# Altium PCB L298N_One_Layer.PcbDoc
Units mm, origin at the board's own origin, x right, y up, seen from the top; angles counter-clockwise.
Board outline 70.5 x 69 mm, 2 copper layers (Top Layer, Bottom Layer); 21 components, 14 nets, 58 pads, 1 vias.
Unrouted connection lines stored in the file: 1.
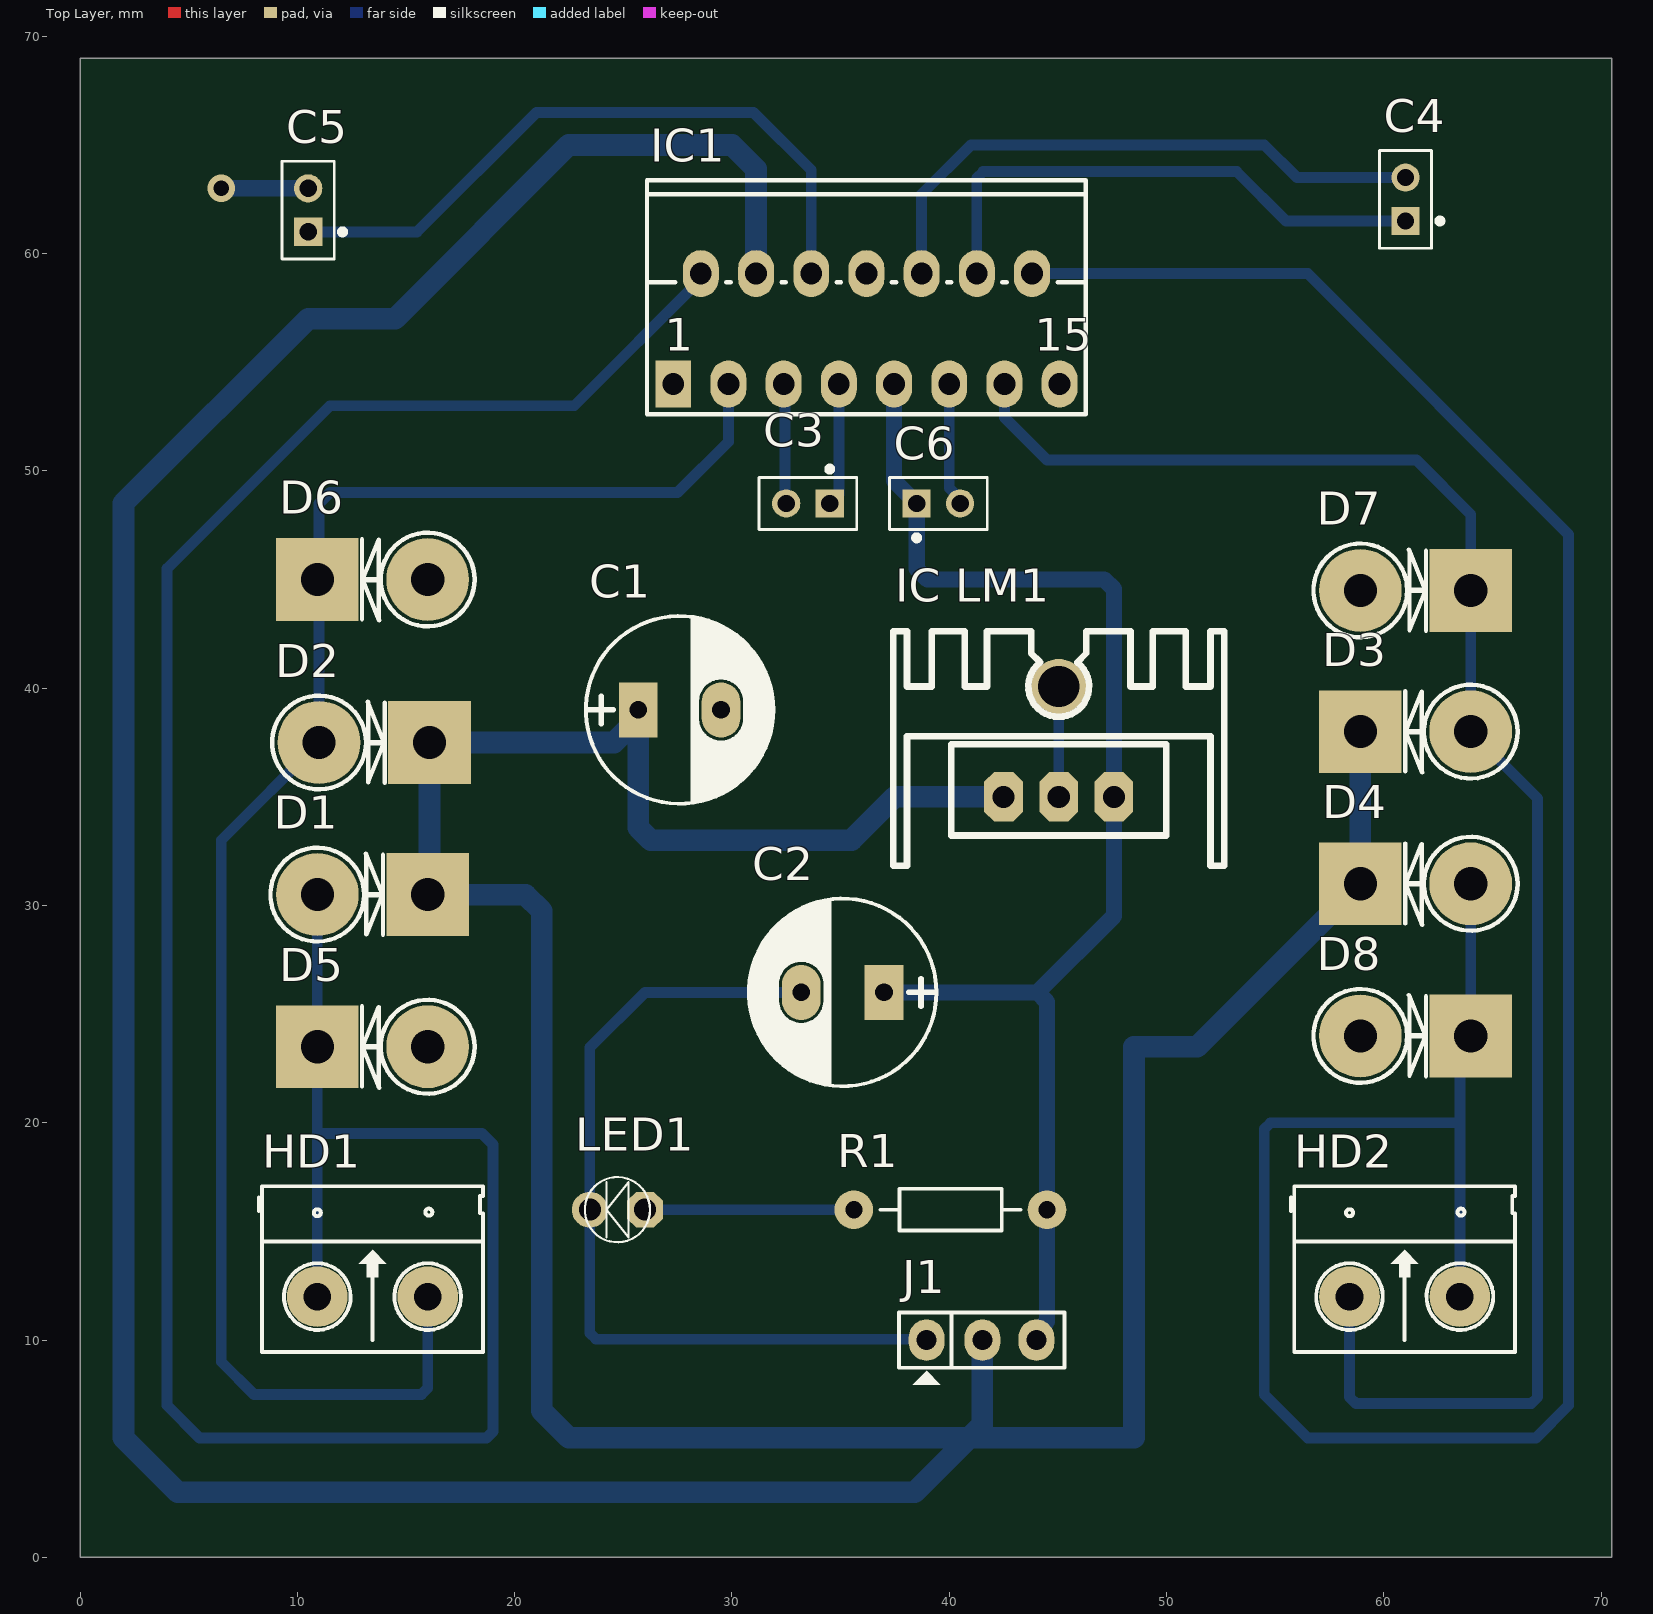
[diagram p0: Top Layer view]
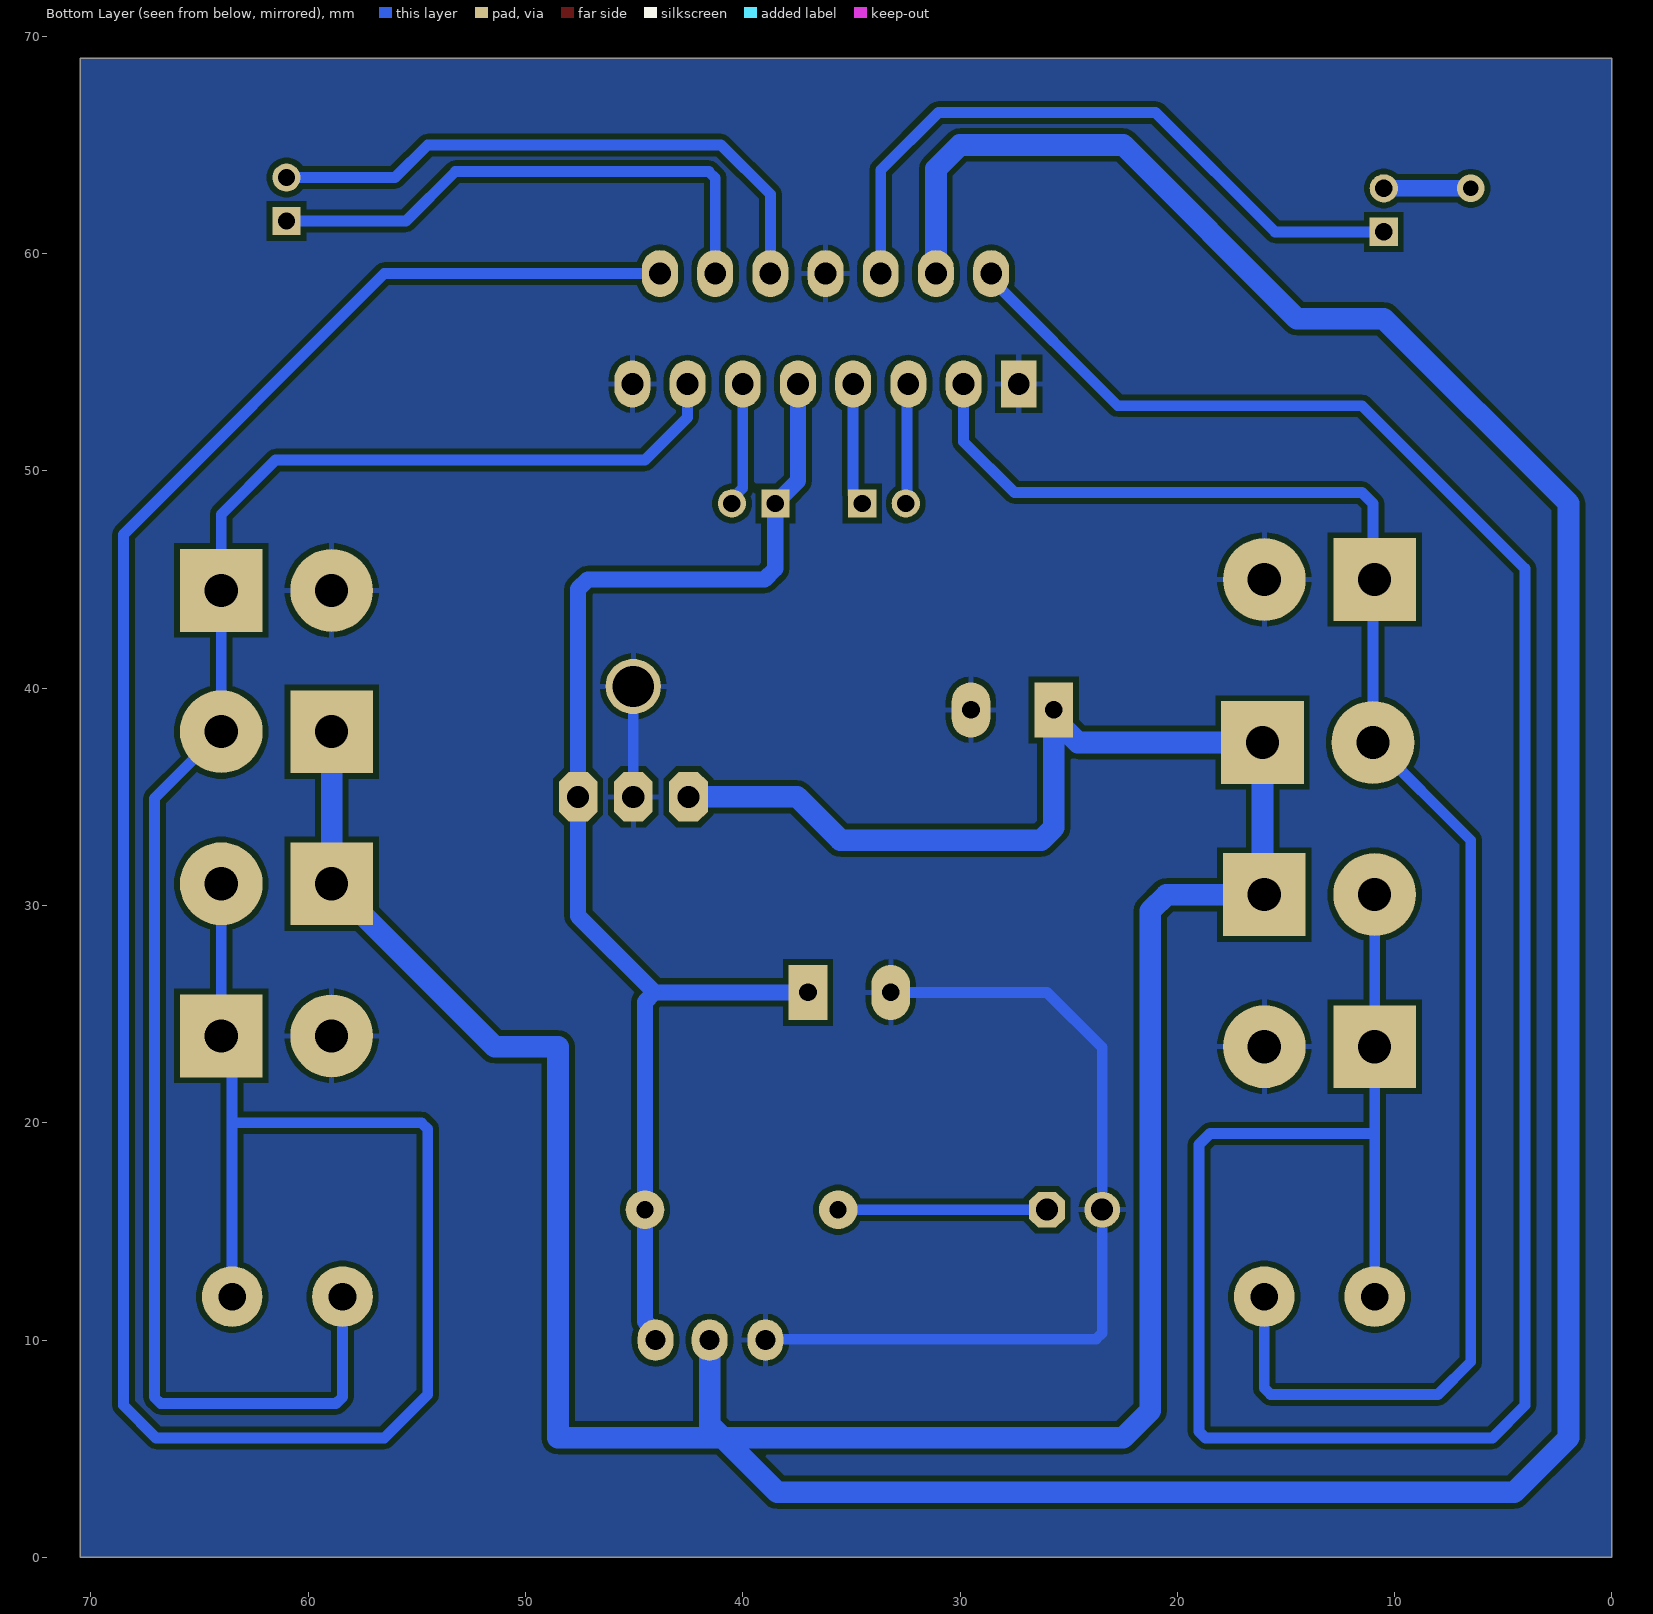
[diagram p1: Bottom Layer view, seen from below]
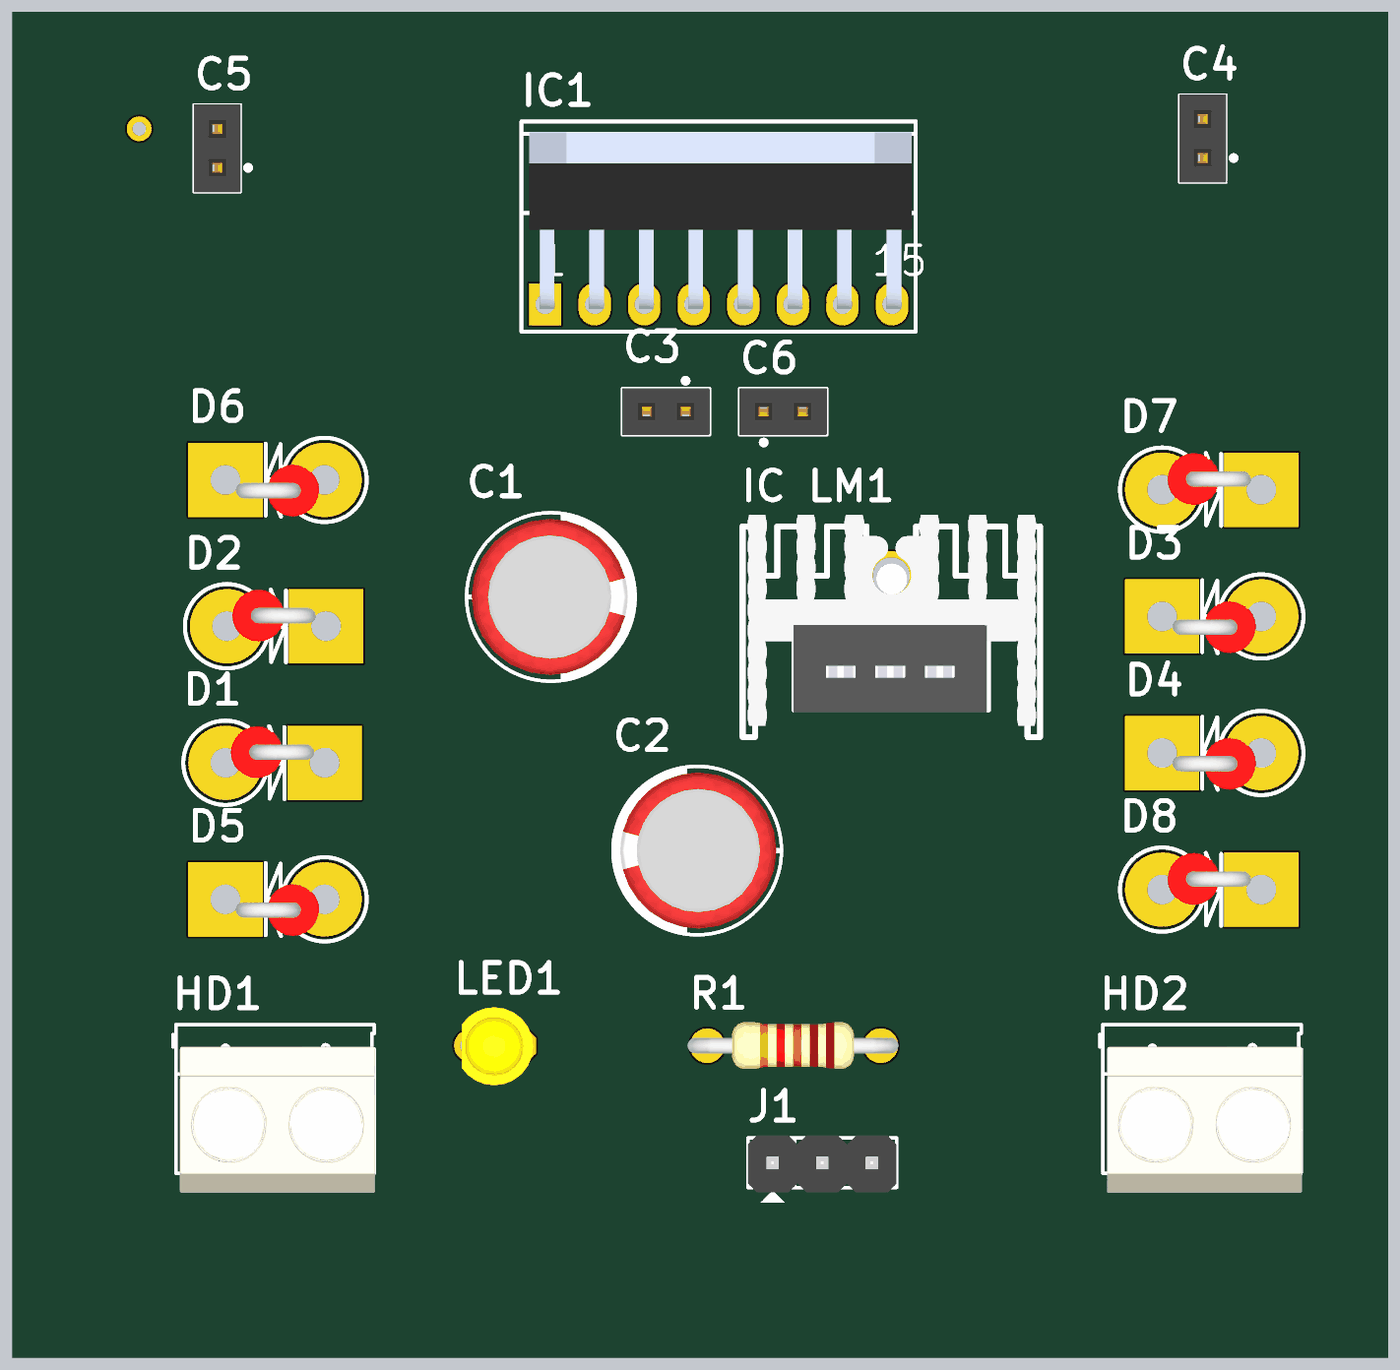
[diagram p2: 3D render of the assembled board from above, using the file's embedded part models]

## Layer stack, top to bottom
Top Solder: solder mask 0.0102, Solder Resist, Dk 3.5
Top Layer: signal copper 0.0356
Dielectric 1: dielectric 0.32, FR-4, Dk 4.8
Bottom Layer: signal copper 0.0356
Bottom Solder: solder mask 0.0102, Solder Resist, Dk 3.5

## Board outline
0,0 70.5,0 70.5,69 0,69

## Design rules (kind name [scope] priority, off if disabled: settings)
Clearance [All] p1: gap=0.254 ignorepadtopadclearanceinfootprint=FALSE except(0: Arc-Hole Track-Hole SMDPad-Hole THPad-Hole Via-Hole Fill-Hole Poly-Hole Region-Hole Text-Hole)
PolygonConnect [All] p1: connectstyle=Relief reliefconductorwidth=0.254 reliefentries=4 polygonreliefangle="90 Angle" airgapwidth=0.254
RoutingVias [All] p1: holewidth=0.711 width=1.27 viastyle="Through Hole" minholewidth=0.711 minwidth=1.27 maxholewidth=0.711 maxwidth=1.27
SolderMaskExpansion [All] p1: expansion=0.102 istentingtop=FALSE
Width [All] p1: maxlimit=1 minlimit=0.254 preferedwidth=0.75 toplayer_maxwidth=0.254 toplayer_prefwidth=0.254 bottomlayer_minwidth=0.5 minimp=50.000000 maximp=50.000000 favimp=50.000000
30 further rules are at their usual default settings.

## Components (designator, comment, footprint, x,y, rotation, side; value= is the part's Value field where it differs from the comment)
C1 "100uF/35V" CP1.5/3.4 25.69,39 r0 top value=100uF/35V/50V
C2 "100uF/35V" CP1.5/3.4 37,26 r180 top value=100uF/35V/50V
C3 "INT MOTOR 1" J2-C1T 33.5,48.5 r180 top
C4 "INT MOTOR 2" J2-C1T 61,62.5 r90 top
C5 "EN MOTOR 1" J2-C1T 10.5,62 r90 top
C6 "EN MOTOR 2" J2-C1T 39.5,48.5 r0 top
D1 "Diode" D5AN 16,30.5 r180 top value=1N5007
D2 "Diode" D5AN 16.08,37.5 r180 top value=1N5007
D3 "Diode" D5AN 58.92,38 r0 top value=1N5007
D4 "Diode" D5AN 58.92,31 r0 top value=1N5007
D5 "Diode" D5AN 10.92,23.5 r0 top value=1N5007
D6 "Diode" D5AN 10.92,45 r0 top value=1N5007
D7 "Diode" D5AN 64,44.5 r180 top value=1N5007
D8 "Diode" D5AN 64,24 r180 top value=1N5007
HD1 "MOTOR 1" HED2 10.92,12 r0 top value="Header 2"
HD2 "MOTOR 2" HED2 58.42,12 r0 top value="Header 2"
IC1 "L298" DIP15SL2 36.19,56.54 r0 top
"IC LM1" "LM7805" QTO-220H3 42.5,35 r0 top
J1 "Cấp nguồn" JP3 41.5,10 r0 top value=J3
LED1 "LED" LED-3MM-YELLOW 26,16 r180 top value="LED 3 ly Single Colour"
R1 "220" R1/4W 35.61,16 r0 top value="R1/4W - 1K"

## Footprints (in the part's own frame and the unit in brackets; to place one, negate y for a bottom-side part, rotate by r counter-clockwise, add the part's x,y. Pads: shape width x height; smd on the part's side, far side on the other; paste and mask are expansions set on the pad)
CP1.5/3.4 [mil] "Tu hoa 220->470uF,16V, 470uF/16V,25V"
  rect 70x100 hole 32: 1(0,0)
  oval 70x100 hole 32: 2(150,0)
  silkscreen extent -95,-170 245,170, body extent -85,-157 230,157, height 446
D5AN [mil] "Diode 5A, W 200mil, L 250mil"
  round 150 hole 60: 1(200,0)
  rect 150x150 hole 60: 2(0,0)
  silkscreen extent 81,-85 285,85, body extent 21,-74 189,31, height 252
DIP15SL2 [mil]
  rect 65x85 hole 39.37: 1(-350,-100)
  oval 65x85 hole 39.37: 2(-300,100) 3(-250,-100) 4(-200,100) 5(-150,-100) 6(-100,100) 7(-50,-100) 8(0,100) 9(50,-100) 10(100,100) 11(150,-100) 12(200,100) 13(250,-100) 14(300,100) 15(350,-100)
  silkscreen extent -398,-155 398,269, body extent -382,-110 390,247, height 895
HED2 [mil] "Header 2, 2 pin, hight 300mil, Pin to Pin 200, Colour Green"
  round 110 hole 50: 1(0,0) 2(200,0)
  silkscreen extent -106,-100 300,200, body extent -92,-140 302,155, height 394
J2-C1T [mm] "2p, 1 row, straight, gold plating"
  rect 1.3x1.3 hole 0.8: 1(-1,0)
  round 1.3 hole 0.8: 2(1,0)
  silkscreen extent -2.25,-1.71 2.25,1.2, body extent -2.25,-1.2 2.25,1.2, height 4.31
JP3 [mil] "Jumper 3"
  oval 65x75 hole 36: 1(-100,0) 2(1,0) 3(99,0)
  silkscreen extent -150,-81 150,50, body extent -150,-60 150,55, height 355
LED-3MM-YELLOW [mil]
  oct 65x65 hole 40: 1(0,0)
  round 65 hole 40: 2(100,0)
  silkscreen extent -9,-59 109,59, body extent -27,-77 117,80, height 181
QTO-220H3 [mil] "TO-220 1-2-3"
  oct 70x90 hole 40: 1(0,0) 2(100,0) 3(200,0)
  round 100 hole 75: 2(100,200)
  silkscreen extent -200,-125 400,300, body extent -190,-102 392,323, height 984
R1/4W [mil] "R 1/4W, 2 Pin, 350mil"
  round 70 hole 31: 1(0,0) 2(350,0)
  silkscreen extent 48,-38 302,38, body extent -40,-47 386,47, height 111

## Part data
C1 C2: library part CP3, "Cap 100uF/35V - 470uF/16V", Description 1="1000uF/6,3V - 470uF/16V - 330uF - 25V", Description 2="220uF/35V - 100uF/50V - 63V - 4,7uF/200V", Description 3="22uF => 33uF100V - 3,3uF => 4,7uF/250V", Description 4="2,2uF =>3,3uF/350 - 2,2uF/400V - 1uF/450V"
C3 C4 C5 C6: library part JP2x1-2.0, "WR-PHD 2.00 mm Socket Header", Manufacturer="W¨¹rth Elektronik eiSos GmbH", partNo=62000211821, ComponentLink1 Description=Manufacturer, ComponentLink1URL=http://www.we-online.com, ComponentLink2 Description=Datasheet, ComponentLink2URL=http://katalog.we-online.de/em/datasheet/6200xx11821.pdf, Created by="Karrer Zheng", Created Date="2 April 2013", NoPins=02
D1 D2 D3 D4 D5 D6 D7 D8: "Default Diode", Code - JEDEC=DO-214-AB, Published=8-Jun-2000, Publisher="Altium Limited", Revision="July-2002: Re-released for DXP Platform."
HD1 HD2: library part Hed2, "Header 2 (Green)"
IC1: "Dual Full-H Driver", ComponentLink1Description="Manufacturer Link", ComponentLink1URL=http://www.ti.com/, DatasheetVersion=Jun-1990, Note="The tab is elec is connected to GND pin", PackageDescription="TO, Thru-Hole, Vertical, Heatsink Mounted; 15 Bent Staggered Leads; Pitch 1.27 mm", PackageReference=KV015, Published=15-May-2002, Publisher="Altium Limited"
"IC LM1": library part LM78xx, "On ap +, from + 5 to + 24VDC"
J1: library part JP3, "Jumper 3"
LED1: "LED Single colour Green and Red"
R1: library part Res_1, "Resistor 1/4W"

## Via types
v1: diameter 1.27, hole 0.711, Top Layer to Bottom Layer, 1 vias

## Nets (pads, with @x,y where several pads share a name; then routed paths per layer and width w, separated by ;. In a path a pad name is that pad's centre, name@x,y a point inside that pad or via, vN(x,y) a via of type N, cw(c..) or ccw(c..) an arc to the next point about the centre after c; other vN are vias at no path point)
5V: "IC LM1.3" C2.1 C5.2 C6.1 IC1.9 J1.3 R1.2 | length 65.9
  Bottom Layer w0.75: v1(6.5,63) C5.2 ; C2.1 44.061,26 ; IC1.9 37.46,49.54 C6.1 38.5,45.5 39,45 47.141,45 47.58,44.561 47.58,35 47.5,34.92 47.58,34.84 47.58,29.519 44.061,26 ; J1.3 44.015,10.371 44.5,10.856 R1.2 44.5,25.561 44.061,26
7-35V: "IC LM1.1" C1.1 D1.2 D2.2 D3.2 D4.2 IC1.4 J1.2 | length 265.2
  Bottom Layer w1: C1.1 C1.1@25.69,38.619 ; IC1.4 31.11,63.89 30,65 22.5,65 14.5,57 10.5,57 2,48.5 2,5.5 4.5,3 38.414,3 40.914,5.5 ; J1.2 41.525,6.111 40.914,5.5 ; 42.5,35 37.5,35 35.5,33 26.276,33 25.69,33.586 C1.1@25.69,38.619 ; D3.2 D4.2 51.42,23.5 48.5,23.5 48.5,5.5 40.914,5.5 ; C1.1@25.69,38.619 24.571,37.5 D2.2 16.08,30.58 D1.2 20.5,30.5 21.25,29.75 21.25,6.75 22.5,5.5 40.914,5.5
GND: "IC LM1.2" C1.2 C2.2 D5.1 D6.1 D7.1 D8.1 IC1.1 IC1.8 IC1.15 J1.1 LED1.2 | length 44.6
  Bottom Layer w0.5: C2.2 26,26 23.46,23.46 LED1.2 23.46,10.333 23.753,10.04 38.92,10.04 J1.1 ; 45.04,35 45.04,40.08
NetC3_1: C3.1 IC1.7 | length 5.7
  Bottom Layer w0.5: C3.1 34.92,48.92 IC1.7
NetC3_2: C3.2 IC1.5 | length 5.5
  Bottom Layer w0.5: IC1.5 32.44,53.94 32.44,48.56 C3.2
NetC4_1: C4.1 IC1.12 | length 25.4
  Bottom Layer w0.5: IC1.12@41.385,59.195 IC1.12 41.27,63.477 41.563,63.77 53.23,63.77 55.5,61.5 C4.1
NetC4_2: C4.2 IC1.10 | length 27.5
  Bottom Layer w0.5: IC1.10 38.73,62.73 41,65 54.5,65 56,63.5 C4.2
NetC5_1: C5.1 IC1.6 | length 31.4
  Bottom Layer w0.5: C5.1 15.5,61 21,66.5 31,66.5 33.65,63.85 IC1.6 IC1.6@33.575,59.155
NetC6_2: C6.2 IC1.11 | length 5.7
  Bottom Layer w0.5: IC1.11 40,49.216 40.5,48.716 C6.2
NetLED1_1: LED1.1 R1.1 | length 9.6
  Bottom Layer w0.5: LED1.1 R1.1
OUT1: D1.1 D5.2 HD1.1 IC1.2 | length 124.6
  Bottom Layer w0.5: HD1.1 10.92,19.5 ; D1.1 D5.2 10.92,19.5 ; IC1.2 28.57,58.826 22.744,53 11.5,53 4,45.5 4,7 5.5,5.5 18.707,5.5 19,5.793 19,19 18.5,19.5 10.92,19.5
OUT2: D2.1 D6.2 HD1.2 IC1.3 | length 78.6
  Bottom Layer w0.5: HD1.2 16,7.793 15.707,7.5 8,7.5 6.5,9 6.5,33 D2.1 11,44.92 D6.2 11,45.08 11,48.5 11.5,49 27.5,49 29.84,51.34 IC1.3
OUT3: D3.1 D7.2 HD2.1 IC1.13 | length 80.3
  Bottom Layer w0.5: IC1.13 42.54,52.46 44.5,50.5 61.5,50.5 64,48 D7.2 D3.1 67.08,34.92 67.08,7.373 66.787,7.08 58.713,7.08 58.42,7.373 HD2.1
OUT4: D4.1 D8.2 HD2.2 IC1.14 | length 125.7
  Bottom Layer w0.5: IC1.14 56.5,59.08 68.5,47.08 68.5,7 67,5.5 56.5,5.5 54.5,7.5 54.5,19.707 54.793,20 63.5,20 ; HD2.2 63.5,20 ; D4.1 D8.2 63.5,23.5 63.5,20

## Polygon pours and split planes (outlines as drawn)
GND on Bottom Layer "GND_L02_P000" (solid, remove dead copper, pour order 0): 0,69 70.5,69 70.5,0 0,0

## Dimensions
70.5,69 to 70.5,0 on Bottom Layer
0,69 to 70.5,69 on Bottom Layer

## Text inside footprints (layer, text, board x,y; h text height)
IC1: Top Overlay "15" at 43.937,55.524 h1.5; Top Overlay "1" at 26.919,55.524 h1.5